# Altium PCB 分控板.PcbDoc
Units mil, origin at the board's own origin, x right, y up, seen from the top; angles counter-clockwise.
Board outline 3945.08 x 2845.03 mil, 2 copper layers (Top Layer, Bottom Layer); 89 components, 68 nets, 328 pads, 92 vias.
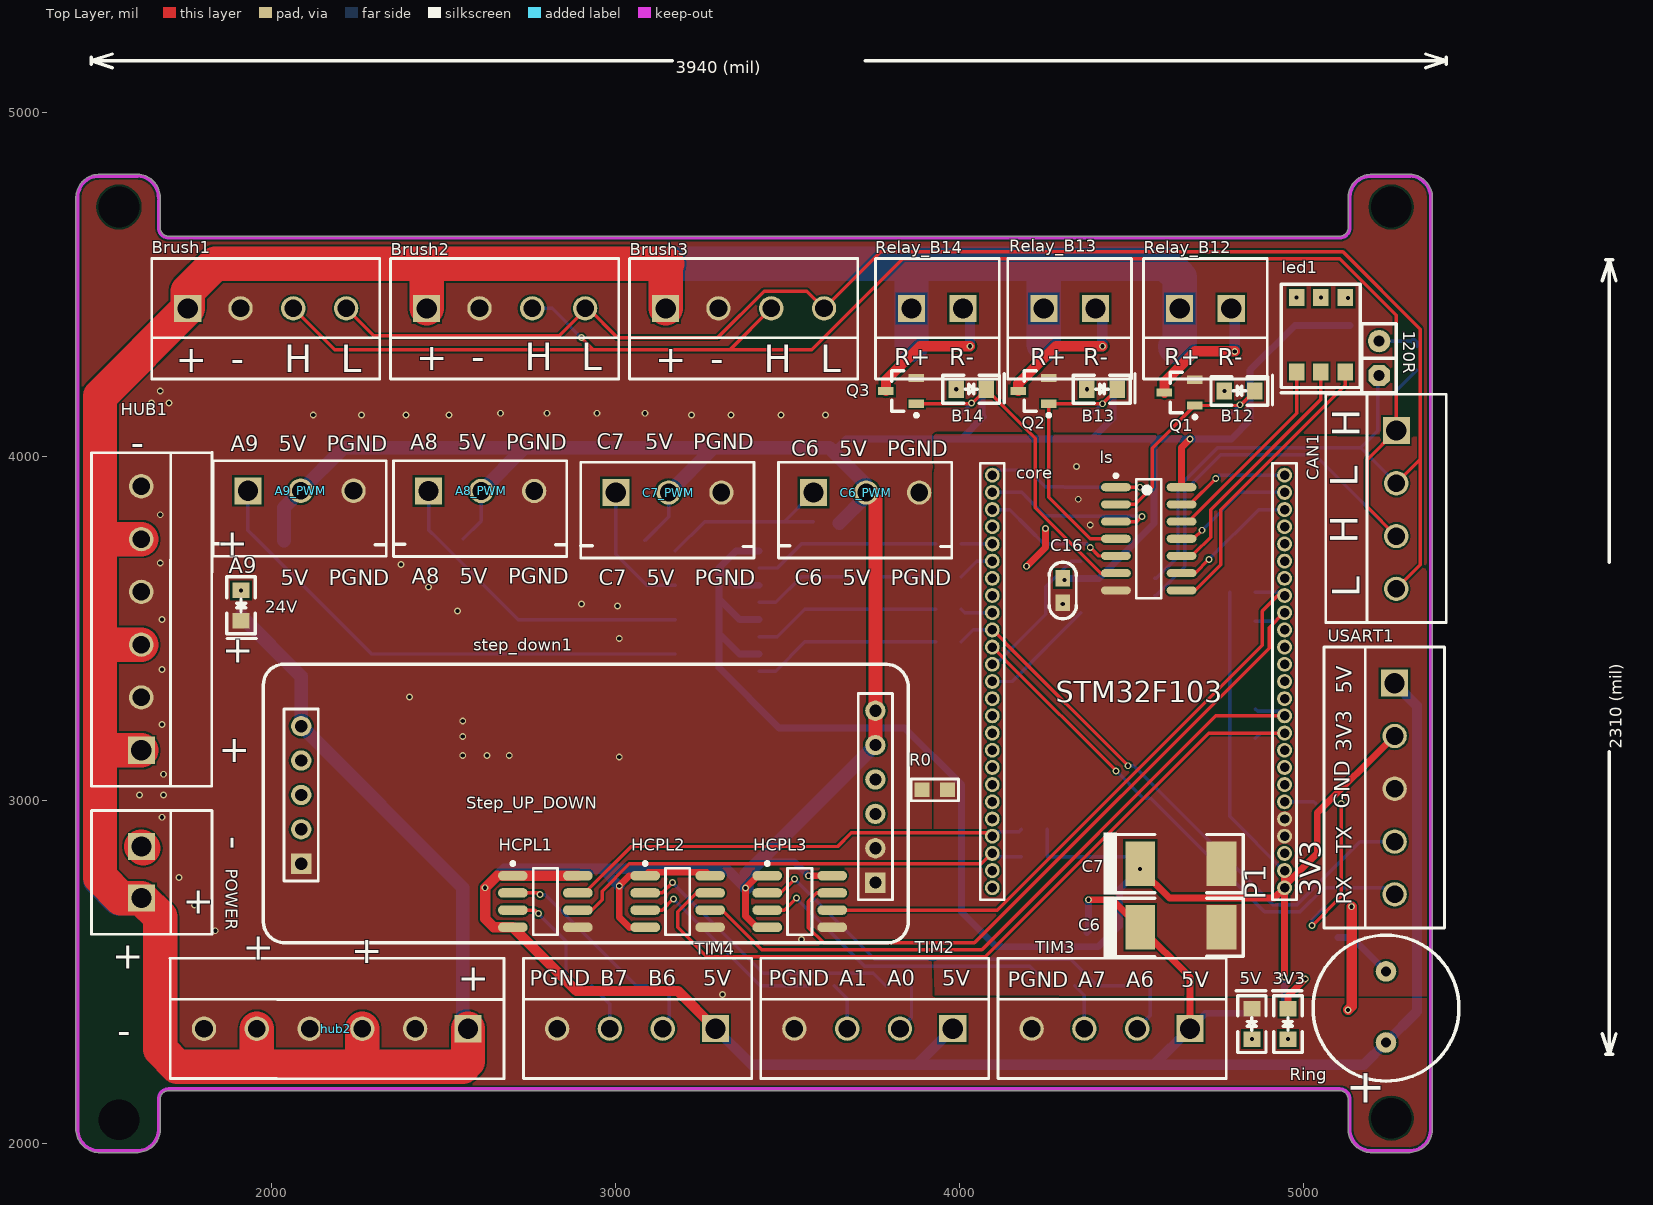
[diagram p0: Top Layer view]
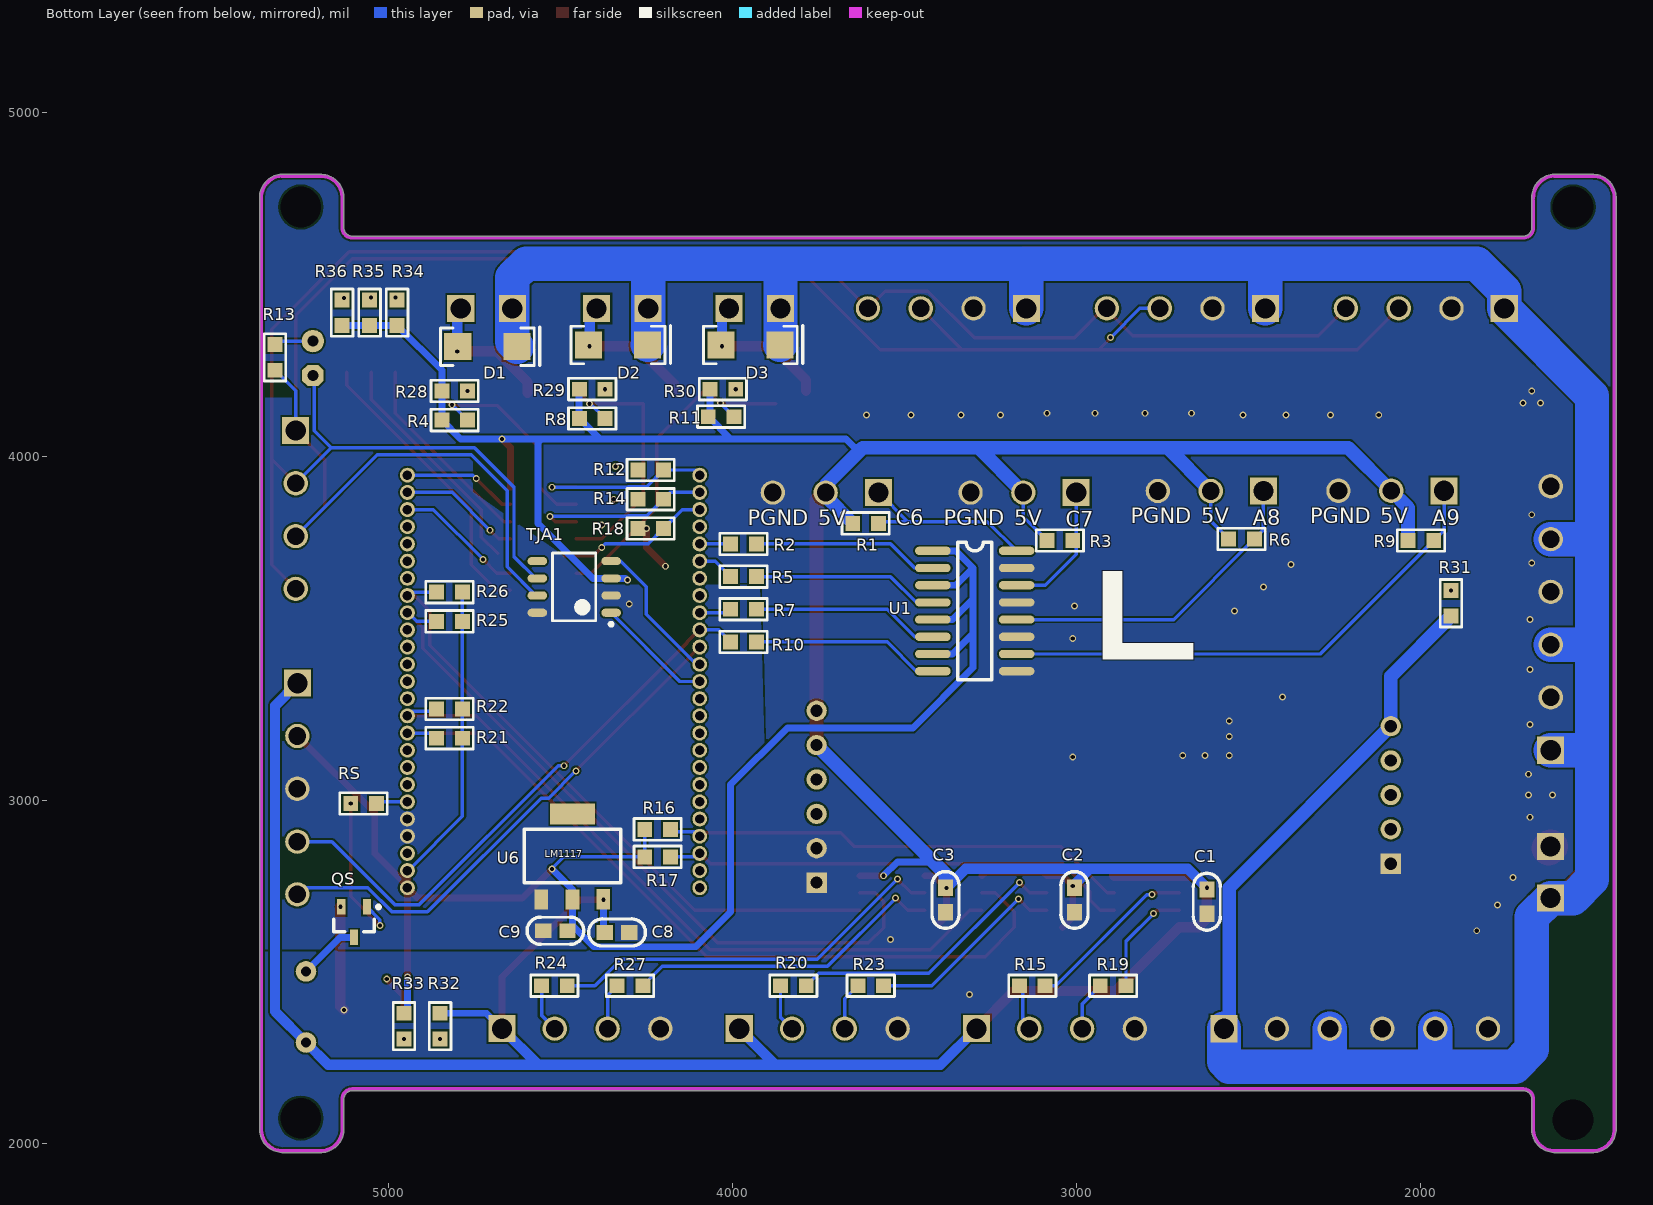
[diagram p1: Bottom Layer view, seen from below]

## Layer stack, top to bottom
Top Layer: signal copper 1.4
Dielectric: dielectric 12.6, FR-4, Dk 4.8
Bottom Layer: signal copper 1.4

## Board outline
1494.8,1974.99 ccw(c1495,1980) 1495,1974.98 1604.9,1974.98 ccw(c1607.5,2042.5) 1675.01,2039.8 ccw(c1670,2040) 1675.02,2040 1675.02,2130 cw(c1700,2130) 1700,2154.99 5105,2154.99 cw(c5105,2130) 5129.98,2130 5129.98,2045.1 ccw(c5197.5,2042.5) 5194.8,1974.99 ccw(c5195,1980) 5195,1974.98 5304.9,1974.98 ccw(c5307.5,2042.5) 5375.01,2039.8 ccw(c5370,2040) 5375.02,2040 5375.02,4749.9 ccw(c5307.5,4752.5) 5375.06,4752.5 ccw(c5307.5,4752.5) 5310.2,4820.01 ccw(c5310,4815) 5310,4820.02 5200.1,4820.02 ccw(c5197.5,4752.5) 5129.99,4755.2 ccw(c5135,4755) 5129.98,4755 5129.98,4665 cw(c5105,4665) 5105,4640.02 1700,4640.02 cw(c1700,4665) 1675.02,4665 1675.02,4745 ccw(c1670,4745) 1674.35,4747.5 ccw(c1670,4750) 1675.01,4749.8 ccw(c1607.5,4752.5) 1675.07,4752.5 ccw(c1607.5,4752.5) 1610.2,4820.01 ccw(c1610,4815) 1610,4820.02 1500.1,4820.02 ccw(c1497.5,4752.5) 1429.99,4755.2 ccw(c1435,4755) 1429.98,4755 1429.98,2045.1 ccw(c1497.5,2042.5)

## Design rules (kind name [scope] priority, off if disabled: settings)
Clearance [All] p1: gap=6
PolygonConnect [All] p1: connectstyle=Direct reliefconductorwidth=10 reliefentries=4 polygonreliefangle="90 Angle" airgapwidth=10
RoutingVias [All] p1: holewidth=28 width=50 viastyle="Through Hole" minholewidth=28 minwidth=50 maxholewidth=28 maxwidth=50
SolderMaskExpansion [All] p1: expansion=4
Width [All] p1: maxlimit=100 minlimit=10 preferedwidth=10 minimp=50.000000 maximp=50.000000 favimp=50.000000
28 further rules are at their usual default settings.

## Components (designator, comment, footprint, x,y, rotation, side; value= is the part's Value field where it differs from the comment)
3V3 "lED" 0805D 4955,2305 r90 top
5V "lED" 0805D 4850,2305 r90 top
24V "lED" 0805D 1910,3610 r270 top
120R "Header 2" SIP2 5220,4335 r270 top
A8_PWM "Header 3" "Green 3P" 2455.18,3899.53 r0 top
A9_PWM "Header 3" "Green 3P" 1930,3900 r0 top
B12 "lED" 0805D 4770,4190 r0 top
B13 "lED" 0805D 4370,4195 r0 top
B14 "lED" 0805D 3990,4195 r0 top
Brush1 "Header 4" Green_4P 1830,4525 r0 top
Brush2 "Header 4" Green_4P 2525,4525 r0 top
Brush3 "Header 4" Green_4P 3220,4525 r0 top
C1 "Cap" CAP-MLCC-0603 2620,2740 r90 bottom
C2 "Cap" CAP-MLCC-0603 3005,2745 r90 bottom
C3 "Cap" CAP-MLCC-0603 3380,2745 r90 bottom
C6 "Cap Pol1" 6032C 4525,2630 r180 top
C6_PWM "Header 3" "Green 3P" 3575,3895 r0 top
C7 "Cap Pol1" 6032C 4525,2815 r180 top
C7_PWM "Header 3" "Green 3P" 3000,3895 r0 top
C8 "Cap" CAP-MLCC-0603 4300,2615 r180 bottom
C9 "Cap" CAP-MLCC-0603 4550,2620 r0 bottom
C16 "Cap" CAP-MLCC-0603 4300,3645 r90 top
CAN1 "Header 4" Green_4P 5365,4000 r270 top
core "STM32F103 SMALL" STM32F103SMALL 4545,3330 r90 top
D1 "Diode" SS34 4715,4315 r0 bottom
D2 "Diode" SS34 4335,4320 r0 bottom
D3 "Diode" SS34 3950,4320 r0 bottom
HCPL1 "HCPL0630" SOIC8 2795,2705 r0 top
HCPL2 "HCPL0630" SOIC8 3180,2705 r0 top
HCPL3 "HCPL0630" SOIC8 3535,2705 r0 top
HUB1 "Header 6" Green_6P 1525,3220 r90 top (schematic designator hub1)
hub2 "Header 6" Green_6P 2495,2240 r180 top
led1 "5050 LED" 5050LED 4980,4245 r0 top
ls "74ls07_2" 74ls07 4550,3760 r0 top
POWER "Header 2" Green_2P 1525.37,2790 r90 top
Q1 "MOSFET N" NMOS_SOT23 4640,4185 r180 top
Q2 "MOSFET N" NMOS_SOT23 4215,4190 r180 top
Q3 "MOSFET N" NMOS_SOT23 3830,4190 r180 top
QS "8050" SOT-23B_N 5100,2645 r270 bottom
R0 "Res1" RES-0603 3965,3030 r0 top
R1 "RES" RES-0603 3575,3805 r180 bottom
R2 "RES" RES-0603 4005,3745 r0 bottom
R3 "RES" RES-0603 3010,3755 r180 bottom
R4 "RES" RES-0603 4845,4105 r0 bottom
R5 "RES" RES-0603 4005,3650 r0 bottom
R6 "RES" RES-0603 2481.84,3759.53 r180 bottom
R7 "RES" RES-0603 4005,3555 r0 bottom
R8 "RES" RES-0603 4445,4110 r0 bottom
R9 "RES" RES-0603 1960,3755 r180 bottom
R10 "RES" RES-0603 4005,3460 r0 bottom
R11 "RES" RES-0603 4070,4115 r0 bottom
R12 "Res1" RES-0603 4275,3960 r0 bottom
R13 "Res1" RES-0603 5330,4325 r90 bottom
R14 "Res1" RES-0603 4275,3875 r0 bottom
R15 "Res1" RES-0603 3165,2460 r0 bottom
R16 "Res1" RES-0603 4180,2915 r180 bottom
R17 "Res1" RES-0603 4180,2835 r180 bottom
R18 "Res1" RES-0603 4275,3790 r0 bottom
R19 "Res1" RES-0603 2930,2460 r0 bottom
R20 "Res1" RES-0603 3860,2460 r0 bottom
R21 "Res1" RES-0603 4860,3180 r0 bottom
R22 "Res1" RES-0603 4860,3265 r0 bottom
R23 "Res1" RES-0603 3635,2460 r0 bottom
R24 "Res1" RES-0603 4555,2460 r0 bottom
R25 "Res1" RES-0603 4860,3520 r0 bottom
R26 "Res1" RES-0603 4860,3605 r0 bottom
R27 "Res1" RES-0603 4335,2460 r0 bottom
R28 "RES" RES-0603 4845,4190 r0 bottom
R29 "RES" RES-0603 4445,4195 r0 bottom
R30 "RES" RES-0603 4065,4195 r0 bottom
R31 "RES" RES-0603 1910,3535 r270 bottom
R32 "RES" RES-0603 4850,2380 r90 bottom
R33 "RES" RES-0603 4955,2380 r90 bottom
R34 "RES" RES-0603 4975,4455 r90 bottom
R35 "RES" RES-0603 5055,4455 r90 bottom
R36 "RES" RES-0603 5135,4455 r90 bottom
Relay_B12 "Header 2" Green_2P 4715,4525 r0 top
Relay_B13 "Header 2" Green_2P 4320,4525 r0 top
Relay_B14 "Header 2" Green_2P 3935,4525 r0 top
Ring "Bell" RING 5240,2395 r90 top
RS "Res1" RES-0603 5110,2990 r0 bottom
step_down1 "Step_DOWN" Step_Up_Down 2890,3005 r0 top
TIM2 "Header 4" Green_4P 3905,2240.37 r180 top
TIM3 "Header 4" Green_4P 4595,2240.37 r180 top
TIM4 "Header 4" Green_4P 3215,2240.37 r180 top
TJA1 "TJA1050" TJA1050 4460,3620 r0 bottom
U1 "TLP281-4" SOP16 3405,3725 r180 bottom
U6 "tlv1117-3.3" LM1117 4475,2835 r180 bottom
USART1 "Header 5" Green_5P 5360,3265 r270 top

## Footprints (in the part's own frame and the unit in brackets; to place one, negate y for a bottom-side part, rotate by r counter-clockwise, add the part's x,y. Pads: shape width x height; smd on the part's side, far side on the other; paste and mask are expansions set on the pad)
74ls07 [mm]
  oval 2.2x0.6 smd: 1(-2.425,3.81) 2(-2.425,2.54) 3(-2.425,1.27) 4(-2.425,0) 5(-2.425,-1.27) 6(-2.425,-2.54) 7(-2.425,-3.81) 8(2.425,-3.81) 9(2.425,-2.54) 10(2.425,-1.27) 11(2.425,0) 12(2.425,1.27) 13(2.425,2.54) 14(2.425,3.81)
  silkscreen extent -2.55,-4.4 0.93,4.78, body extent -2,-4.4 2,4.4, height 1.7
0805D [mil]
  rect 45x50 smd: A(0,0) K(88,0)
  silkscreen extent -39,-41 140,45
5050LED [mm]
  rect 1.143x1.27 smd: A1(0,5.5) A2(1.8,5.5) A3(3.6,5.5) K1(0,0) K2(1.8,0) K3(3.6,0)
  silkscreen extent -1.14,-1.52 4.7,6.48
6032C [mm]
  rect 2.2x3.3 smd: 1(0,0) 2(-6,0)
  silkscreen extent -7.6,-2.29 2.72,2.28
CAP-MLCC-0603 [mm]
  rect 1.2x1.1 smd: 1(0,0) 2(-1.8,0)
  silkscreen extent -3,-1 1.2,1, body extent -1.77,-0.47 -0.02,0.48, height 0.85
"Green 3P" [mm]
  rect 2x2 hole 1.5: 1(0.004,-0.012)
  round 1.8 hole 1.3: 2(3.904,-0.012) 3(7.804,-0.012)
  silkscreen extent -2.58,-4.85 10.22,2.22
Green_2P [mm]
  rect 2x2 hole 1.5: 1(-1.905,-2.413) 2(1.905,-2.413)
  silkscreen extent -4.57,-7.62 4.57,1.27
Green_4P [mm]
  rect 2x2 hole 1.5: 1(-1.905,-2.413)
  round 1.8 hole 1.3: 2(1.995,-2.413) 3(5.895,-2.413) 4(9.795,-2.413)
  silkscreen extent -4.57,-7.62 12.28,1.27
Green_5P [mm]
  rect 2x2 hole 1.5: 1(-1.905,-2.413)
  round 1.8 hole 1.3: 2(1.995,-2.413) 3(5.895,-2.413) 4(9.795,-2.413) 5(13.695,-2.413)
  silkscreen extent -4.57,-7.62 16.18,1.27
Green_6P [mm]
  rect 2x2 hole 1.5: 1(-1.905,-2.413)
  round 1.8 hole 1.3: 2(1.995,-2.413) 3(5.895,-2.413) 4(9.795,-2.413) 5(13.695,-2.413) 6(17.595,-2.413)
  silkscreen extent -4.57,-7.63 20.12,1.27
LM1117 [mm]
  rect 1x1.5 smd: 1(-2.043,-3.148) 2(0.256,-3.148) 3(2.53,-3.123)
  rect 3.3x1.549 smd: 4(0.254,3.175)
  silkscreen extent -3.3,-1.91 3.81,2.03
NMOS_SOT23 [mm]
  rect 1.15x0.6 smd: D(1.125,0) G(-1.125,0.95) S(-1.125,-0.95)
  silkscreen extent -1.25,-1.5 0.7,1.92, body extent -0.7,-1.5 0.7,1.5, height 1.14
RES-0603 [mm]
  rect 1.1x1.1 smd: 1(0,0) 2(-1.9,0)
  silkscreen extent -2.7,-0.8 0.8,0.8, body extent -1.8,-0.47 -0.1,0.48, height 0.6
RING [mil]
  round 60 hole 30: 1(-100,0) 2(106.69,0)
  silkscreen extent -212,-212 212,212
SIP2 [mil]
  round 65 hole 32: 1(0,0)
  oct 62x62 hole 32: 2(100,0)
  silkscreen extent -50,-50 150,50
SOIC8 [mm]
  oval 2.2x0.7 smd: 1(-2.4,1.905) 2(-2.4,0.635) 3(-2.4,-0.635) 4(-2.4,-1.905) 5(2.4,-1.905) 6(2.4,-0.635) 7(2.4,0.635) 8(2.4,1.905)
  silkscreen extent -2.52,-2.45 0.9,2.93
SOP16 [mil]
  oval 103.62x24 smd: 1(-11.81,0) 2(-11.81,-50) 3(-11.81,-100) 4(-11.81,-150) 5(-11.81,-200) 6(-11.81,-250) 7(-11.81,-300) 8(-11.81,-350) 9(231.81,-350) 10(231.81,-300) 11(231.81,-250) 12(231.81,-200) 13(231.81,-150) 14(231.81,-100) 15(231.81,-50) 16(231.81,0)
  silkscreen extent 60,-375 160,25
SOT-23B_N [mm] "SOT23, 3-Leads, Body 2.9x1.3mm, Pitch 0.95mm, Lead Span 2.4mm, IPC Medium Density"
  rect 1.15x0.6 smd: 1(-1.125,0.95) 2(-1.125,-0.95) 3(1.125,0)
  silkscreen extent -1.25,-1.5 0.7,1.92, body extent -0.7,-1.5 0.7,1.5, height 1.14
SS34 [mm]
  rect 2x2 smd: A(2.125,-0.102) K(-2.25,-0.102)
  silkscreen extent -3.94,-1.52 3.4,1.3, body extent -2.48,-1.48 2.37,1.3, height 1.4
Step_Up_Down [mm]
  rect 1.5x1.5 hole 0.9: 1(-20.447,-4.826) 6(21.971,-6.223)
  round 1.5 hole 0.9: 2(-20.447,-2.286) 3(-20.447,0.254) 4(-20.447,2.794) 5(-20.447,5.334) 7(21.971,-3.683) 8(21.971,-1.143) 9(21.971,1.397) 10(21.971,3.937) 11(21.971,6.477)
  silkscreen extent -23.24,-10.67 24.38,9.91
STM32F103SMALL [mm]
  round 1.1 hole 0.7: 1(-14.859,-10.16) 2(-13.589,-10.16) 3(-12.319,-10.16) 4(-11.049,-10.16) 5(-9.779,-10.16) 6(-8.509,-10.16) 7(-7.239,-10.16) 8(-5.969,-10.16) 9(-4.699,-10.16) 10(-3.429,-10.16) 11(-2.159,-10.16) 12(-0.889,-10.16) 13(0.381,-10.16) 14(1.651,-10.16) 15(2.921,-10.16) 16(4.191,-10.16) 17(5.461,-10.16) 18(6.731,-10.16) 19(8.001,-10.16) 20(9.271,-10.16) 21(10.541,-10.16) 22(11.811,-10.16) 23(13.081,-10.16) 24(14.351,-10.16) 25(15.621,-10.16) 26(-14.859,11.43) 27(-13.589,11.43) 28(-12.319,11.43) 29(-11.049,11.43) 30(-9.779,11.43) 31(-8.509,11.43) 32(-7.239,11.43) 33(-5.969,11.43) 34(-4.699,11.43) 35(-3.429,11.43) 36(-2.159,11.43) 37(-0.889,11.43) 38(0.381,11.43) 39(1.651,11.43) 40(2.921,11.43) 41(4.191,11.43) 42(5.461,11.43) 43(6.731,11.43) 44(8.001,11.43) 45(9.271,11.43) 46(10.541,11.43) 47(11.811,11.43) 48(13.081,11.43) 49(14.351,11.43) 50(15.621,11.43)
  silkscreen extent -15.75,-11.05 16.51,12.32
TJA1050 [mm] "SOIC, 8-Leads, Body 4.90x3.90mm, Pitch 1.27mm, IPC Medium Density"
  oval 1.45x0.6 smd: 1(-2.725,1.905) 2(-2.725,0.635) 3(-2.725,-0.635) 4(-2.725,-1.905) 5(2.725,-1.905) 6(2.725,-0.635) 7(2.725,0.635) 8(2.725,1.905)
  silkscreen extent -2.85,-2.5 1.6,2.88, body extent -2,-2.5 2,2.5, height 1.75

## Part data
3V3 5V 24V B12 B13 B14: library part 00-D-LED, "LED"
120R POWER Relay_B12 Relay_B13 Relay_B14: "Header, 2-Pin"
A8_PWM A9_PWM C6_PWM C7_PWM: "Header, 3-Pin"
Brush1 Brush2 Brush3 CAN1 TIM2 TIM3 TIM4: "Header, 4-Pin"
C1 C2 C3 C8 C9 C16: "Capacitor"
C6 C7: "Polarized Capacitor (Radial)"
HUB1 hub2: "Header, 6-Pin"
QS: library part QNPN, "NPN Bipolar Transistor"
R0 R12 R13 R14 R15 R16 R17 R18 R19 R20 R21 R22 R23 R24 R25 R26 R27 RS: "Resistor"
R1 R2 R3 R4 R5 R6 R7 R8 R9 R10 R11 R28 R29 R30 R31 R32 R33 R34 R35 R36: "电阻"
Ring: "Electrical Bell"
TJA1: "CAN总线收发器"
U1: library part IC-TLP521-4, "TLP521-4,TLP281-4"
U6: library part LM1117IMP-5.0, "800mA Low-Dropout Linear Regulator"
USART1: "Header, 5-Pin"

## Free pads (board coordinates)
  round 30 hole 118.11: 3(1555,2070) 3(1555,4725) 3(5255,2075) 3(5255,4725)

## Via types
v1: diameter 20, hole 12, Top Layer to Bottom Layer, 92 vias

## Nets (pads, with @x,y where several pads share a name; then routed paths per layer and width w, separated by ;. In a path a pad name is that pad's centre, name@x,y a point inside that pad or via, vN(x,y) a via of type N, cw(c..) or ccw(c..) an arc to the next point about the centre after c; other vN are vias at no path point)
3V3: C7.1 C9.2 core.1 core.2 R16.2 R17.2 R21.2 R22.2 R25.2 R26.2 R33.1 U1.1 U1.3 U1.5 U1.7 U6.2 USART1.2 | length 5480.4
  Top Layer w20: v1(4525,2800) 4610,2715 4915,2715 core.1 ; v1(4945,2485) core.1 ; core.2 core.1@4945,2750 ; USART1.2 5264.03,3186.46 5040,2962.43 5040,2845 core.1@4945,2750 ; core.1 core.1@4945,2750
  Bottom Layer w10: R16.2 R17.2 4490,2835 v1(4525,2800) ; R26.2 R25.2 R22.2 R21.2 4785.2,2952.97 4943.16,2795 core.2
  Bottom Layer w20: U1.7 3360,3425 3300,3485 ; U1.5 3360,3525 3300,3585 ; U1.3 3350,3625 3300,3675 ; U1.1 3350,3725 3300,3675 ; v1(4525,2800) 4464.92,2739.92 U6.2 4464.92,2634.21 4463.64,2634.21 4402.77,2573.35 4106.65,2573.35 4005,2675 4005,3045 3840,3210 3475,3210 3300,3385 3300,3485 ; v1(4945,2485) 4945,2390 R33.1 ; 3300,3485 3300,3585 ; 3300,3585 3300,3675
5V: A8_PWM.2 A9_PWM.2 C1.1 C2.1 C3.1 C6.1 C6_PWM.2 C7_PWM.2 C8.2 C16.1 HCPL1.1 HCPL1.4 HCPL1.8 HCPL2.1 HCPL2.4 HCPL2.8 HCPL3.1 HCPL3.4 HCPL3.8 ls.14 R1.2 R3.2 R4.1 R6.2 R8.1 R9.2 R11.1 R28.1 R29.1 R30.1 R32.1 R34.2 R35.2 R36.2 Ring.1 step_down1.10 step_down1.11 TIM2.1 TIM3.1 TIM4.1 TJA1.3 U6.3 USART1.1 | length 14036.5
  Top Layer w20: 2655,2780 HCPL1.1@2670,2780 ; 3040,2630 3010,2660 v1(3010,2750) 3040,2780 HCPL2.1 3095.51,2790 3264.49,2790 HCPL2.8 ; 3400,2640 3377.2,2662.8 v1(3377.2,2743.99) 3413.21,2780 HCPL3.1 ; v1(3560,2780) HCPL3.8 ; v1(4375,2710) 4445,2710 C6.1 4670,2485 TIM3.1 ; ls.14 4645.47,4025.47 v1(4670,4050)
  Top Layer w30: 2655,2780 v1(2620,2745) 2620,2655 2645,2630 HCPL1.4 2885.51,2445 3180.37,2445 TIM4.1 ; HCPL1.1@2670,2780 HCPL1.1 HCPL1.8
  Top Layer w40: C6_PWM.2 3755,3868.24 ; step_down1.10 step_down1.11 3755,3868.24 ; C6_PWM.2@3755,3875 3755,3868.24
  Bottom Layer w10: R6.2 2608.89,3811.77 A8_PWM.2 ; R3.2 3153.72,3823.92 C7_PWM.2
  Bottom Layer w20: 3415,2820 3520,2820 v1(3560,2780) ; 3620,4025 3645,4025 3670,4050 4005,4050 ; R30.1 4065,4120 R11.1 4005,4050 ; v1(4305.18,3639.82) 4310.36,3645 TJA1.3 4405,3645 4565,3805 4565,4040 4555,4050 ; C8.2 4375,2619.13 v1(4375,2710) ; R29.1 4445.6,4194.4 4445.6,4110.6 R8.1 4385,4050 ; TIM3.1 4714.63,2380 R32.1 ; R36.2 R35.2 R34.2 4845,4250.2 R28.1 R4.1 4790,4050 v1(4670,4050) 4555,4050 ; 4005,4050 4385,4050 ; 4385,4050 4555,4050
  Bottom Layer w30: v1(2620,2745) 2675,2800 2960,2800 ; v1(3010,2750) 2960,2800 ; TIM4.1 3395.37,2230 3874.63,2230 ; v1(3377.2,2743.99) 3321.2,2800 2960,2800 ; TIM2.1 3874.63,2230 ; TIM3.1 4564.63,2230 ; USART1.1 5330,3275 5330,2385 Ring.1 5175,2230 4564.63,2230 ; 3874.63,2230 4564.63,2230
  Bottom Layer w40: R9.2 2034.8,3850.61 A9_PWM.2 2209.19,4025 2734.84,4025 ; A8_PWM.2 2734.84,4025 ; C7_PWM.2 3154.53,3894.53 3285,4025 ; C3.1 3380,2785 3415,2820 step_down1.10 ; R1.2 3728.72,3883.92 C6_PWM.2 3728.72,3916.28 3620,4025 3285,4025 ; 2734.84,4025 3285,4025
24V: Brush1.1 Brush2.1 Brush3.1 D1.K D2.K D3.K HUB1.1 HUB1.3 HUB1.5 hub2.1 hub2.3 hub2.5 POWER.1 R31.1 Relay_B12.1 Relay_B13.1 Relay_B14.1 step_down1.5 | length 15105
  Top Layer w100: HUB1.1 1505,3145 1500,3150 ; HUB1.3 1502.09,3452.09 1500,3450 ; HUB1.5 1504.17,3759.17 1500,3755 ; hub2.5 1955.83,2230.83 1950,2225 ; hub2.3 2262.91,2232.91 2255,2225 ; Brush2.1 2450,4550 2460,4560 ; hub2.1 2570,2240 2555,2225 2255,2225 ; Brush3.1 3145,4555 3150,4560 2460,4560 ; 1500,3150 1500,3450 ; 1500,3150 1500,2775 1560,2715 POWER.1 1675,2660.37 1675,2275 1725,2225 1950,2225 ; 1500,3450 1500,3755 ; 1500,3755 1500,4175 Brush1.1 1755,4480 1835,4560 2460,4560 ; 1950,2225 2255,2225
  Bottom Layer w40: R31.1 2085,3360 step_down1.5 2555,2745 2555,2350 hub2.1
  Bottom Layer w100: HUB1.1 1500,3145 ; HUB1.3 1512.09,3452.09 1500,3440 ; HUB1.5 1509.17,3759.17 1500,3750 ; hub2.5 1955.83,2225.83 1955,2225 ; hub2.3 2262.91,2227.91 2260,2225 ; Brush2.1 2450,4560 ; hub2.1 2570,2240 2555,2225 2260,2225 ; Brush3.1 3145,4555 3140,4560 ; D3.K 3860,4325.4 Relay_B14.1 3860,4555 3855,4560 ; D2.K 4245,4325.4 Relay_B13.1 4245,4550 4235,4560 ; D1.K 4640,4332.6 Relay_B12.1 4640,4520 4600,4560 4235,4560 ; 1500,3145 1500,3440 ; 1500,3145 1500,2770 1555,2715 POWER.1 1675,2660.37 1675,2275 1725,2225 1955,2225 ; 1500,3440 1500,3750 ; 1500,3750 1500,4175 Brush1.1 1755,4480 1835,4560 2450,4560 ; 1955,2225 2260,2225 ; 2450,4560 3140,4560 ; 3140,4560 3855,4560 ; 3855,4560 4235,4560
A0: R20.1 TIM2.2 | length 138.5
  Bottom Layer w10: TIM2.2 3860,2368.91 R20.1
A1: R23.1 TIM2.3 | length 140.3
  Bottom Layer w10: R23.1 3672.91,2422.09 TIM2.3
A6: R24.1 TIM3.2 | length 140.6
  Bottom Layer w10: TIM3.2 4555,2373.91 R24.1
A7: R27.1 TIM3.3 | length 136.2
  Bottom Layer w10: R27.1 4362.91,2432.09 TIM3.3
A8: A8_PWM.1 R6.1 U1.12 | length 939
  Bottom Layer w10: A8_PWM.1 2455.35,3786.02 R6.1 2716.37,3525 U1.12
A9: A9_PWM.1 R9.1 U1.10 | length 1506.8
  Bottom Layer w10: A9_PWM.1 1930.18,3784.82 R9.1 2290,3425 U1.10
B6: R15.1 TIM4.2 | length 136.5
  Bottom Layer w10: TIM4.2 3155,2353.91 3155,2450 R15.1
B7: R19.1 TIM4.3 | length 146.5
  Bottom Layer w10: R19.1 2982.91,2407.09 TIM4.3
B12: B12.K ls.2 Q1.G R4.2 | length 670.3
  Top Layer w10: ls.2 4510.36,3860 4560,3909.64 4560,4023.31 Q1.G 4815.6,4147.6 B12.K
  Bottom Layer w10: R4.2 4815,4149.8 v1(4815,4150)
B13: B13.K ls.4 Q2.G R8.2 | length 796.4
  Top Layer w10: ls.4 4380,3760 4259.29,3880.71 Q2.G v1(4415.6,4152.6) B13.K
  Bottom Layer w10: R8.2 4412.79,4152.6 v1(4415.6,4152.6)
B14: B14.K ls.6 Q3.G R11.2 | length 994.8
  Top Layer w10: Q3.G 4035.6,4152.6 B14.K 4220,4053 4220,3850 4410,3660 ls.6
  Bottom Layer w10: R11.2 4035,4154.8 v1(4035,4155)
C6: C6_PWM.1 R1.1 U1.16 | length 557
  Bottom Layer w10: U1.16 3258.19,3810 R1.1@3575,3810 ; 3490,3810 C6_PWM.1@3574.85,3894.85
C7: C7_PWM.1 R3.1 U1.14 | length 389.9
  Bottom Layer w10: C7_PWM.1 3000.18,3714.82 3090,3625 U1.14
CAN_H: Brush1.3 Brush2.3 Brush3.3 CAN1.1 CAN1.3 R13.2 TJA1.7 | length 5846.4
  Top Layer w10: Brush1.3 2182.09,4310 2935,4310 ; v1(2900,4345) 2935,4310 ; Brush3.3 3332.09,4310 ; CAN1.3 5185,3852.91 5185,3990 CAN1.1 5270,4410 5105,4575 3835,4575 3570,4310 3332.09,4310 ; 2935,4310 3332.09,4310
  Bottom Layer w10: Brush2.3 2815,4430 v1(2900,4345) ; TJA1.7 4571.93,3595 4655,3678.07 4655,3900 4760,4005 5032.91,4005 CAN1.3 ; CAN1.1 5270,4190.2 R13.2
CAN_L: 120R.2 Brush1.4 Brush2.4 Brush3.4 CAN1.2 CAN1.4 TJA1.6 | length 5604
  Top Layer w10: Brush1.4 2295.63,4350 2835,4350 2910.63,4425.63 Brush2.4 2920,4430 3005,4345 3295.76,4345 3431.2,4480.43 3555.2,4480.43 Brush3.4 3770.63,4595 5115,4595 5340,4370 5340,3991.46 ; CAN1.4 5340,3684.37 5340,3991.46 ; CAN1.2 5340,3991.46
  Bottom Layer w10: TJA1.6 4571.93,3645 4635,3708.07 4635,3910 4750,4025 5166.46,4025 ; 120R.2 5215.63,4230.63 5215.63,4074.17 5166.46,4025 ; CAN1.2 5166.46,4025
CAN_RX: core.39 TJA1.4 | length 447.7
  Bottom Layer w10: core.39@4108.35,3408.35 core.39 4105,3395 4250,3540 4250,3620 4325,3695 TJA1.4
CAN_TX: core.38 TJA1.1 | length 340.6
  Bottom Layer w10: core.38 4152.72,3345 TJA1.1
GND: 3V3.K C6.2 C7.2 C8.1 C9.1 C16.2 core.4 core.5 ls.7 R0.1 R12.1 R14.1 R18.1 TJA1.2 TJA1.8 U6.1 USART1.3 | length 240.5
  Top Layer w20: v1(4195,3680) 4250,3735 v1(4250,3790) ; 3V3.K 4955,2430 v1(5005,2480)
  other v1: 4300,3570 4380,3800 4345,3875 4340,3970
LED1: core.23 ls.9 | length 376.2
  Top Layer w10: ls.9 4685,3660 v1(4725,3700)
  Bottom Layer w10: v1(4725,3700) 4870,3845 core.23
LED2: core.24 ls.11 | length 355.4
  Top Layer w10: ls.11 4680,3760 v1(4705,3785)
  Bottom Layer w10: v1(4705,3785) 4815,3895 core.24
LED3: core.25 ls.13 | length 334.7
  Top Layer w10: ls.13 4670,3860 v1(4745,3935)
  Bottom Layer w10: v1(4745,3935) 4755,3945 core.25
Net3V3_A: 3V3.A R33.2
  other v1: 4955,2305
Net5V_A: 5V.A R32.2
  other v1: 4850,2305
Net24V_A: 24V.A R31.2
  other v1: 1910,3609.8
Net120R_1: 120R.1 R13.1 | length 114.1
  Bottom Layer w10: 120R.1 R13.1@5320,4335
  Bottom Layer w20: R13.1@5320,4335 R13.1
NetB12_A: B12.A R28.2
  other v1: 4770,4190
NetB13_A: B13.A R29.2
  other v1: 4370,4195
NetB14_A: B14.A R30.2
  other v1: 3990,4195
NetD1_A: D1.A Q1.D Relay_B12.2 | length 401.1
  Top Layer w30: Q1.D 4595.71,4215.71 4685,4305 v1(4800,4305)
  Bottom Layer w30: Relay_B12.2 4800,4420 v1(4800,4305)
NetD2_A: D2.A Q2.D Relay_B13.2 | length 428.6
  Top Layer w30: Q2.D 4170.71,4210.71 4280,4320 v1(4415,4320)
  Bottom Layer w30: Relay_B13.2 4415,4410 v1(4415,4320)
NetD3_A: D3.A Q3.D Relay_B14.2 | length 434.4
  Top Layer w30: Q3.D 3785.71,4220.71 3885,4320 v1(4030,4320)
  Bottom Layer w30: Relay_B14.2 4030,4410 v1(4030,4320)
NetHCPL1_2: HCPL1.2 R15.2 | length 501.5
  Top Layer w10: HCPL1.2 2775,2730 v1(2780,2725)
  Bottom Layer w10: v1(2780,2725) 2795,2725 3060,2460 R15.2
NetHCPL1_3: HCPL1.3 R19.2 | length 321.8
  Top Layer w10: HCPL1.3 2765,2680 v1(2775,2670)
  Bottom Layer w10: v1(2775,2670) 2855.2,2589.8 R19.2
NetHCPL2_2: HCPL2.2 R20.2 | length 836.4
  Top Layer w10: HCPL2.2 3135,2730 v1(3165,2760)
  Bottom Layer w10: v1(3165,2760) 3428.35,2496.65 3748.54,2496.65 R20.2
NetHCPL2_3: HCPL2.3 R23.2 | length 592.7
  Top Layer w10: HCPL2.3 3135,2680 v1(3167.5,2712.5)
  Bottom Layer w10: v1(3167.5,2712.5) 3420,2460 R23.2
NetHCPL3_2: HCPL3.2 R24.2 | length 1184.7
  Top Layer w10: HCPL3.2 3480,2730 v1(3520,2770)
  Bottom Layer w10: v1(3520,2770) 3753.35,2536.65 4322.87,2536.65 4399.52,2460 R24.2
NetHCPL3_3: HCPL3.3 R27.2 | length 939.8
  Top Layer w10: HCPL3.3 3490,2680 v1(3525,2715)
  Bottom Layer w10: v1(3525,2715) 3723.35,2516.65 4203.54,2516.65 R27.2
Netled1_A1: led1.A1 R34.1
  other v1: 4980,4461.54
Netled1_A2: led1.A2 R35.1
  other v1: 5050.87,4461.54
Netled1_A3: led1.A3 R36.1
  other v1: 5130,4460
Netled1_K1: led1.K1 ls.12 | length 584.9
  Top Layer w10: ls.12 4664.89,3810 4980,4125.11 led1.K1
Netled1_K2: led1.K2 ls.10 | length 680.1
  Top Layer w10: ls.10@4682.5,3717.5 4730,3765 4730,3845 5050.87,4165.87 led1.K2
Netled1_K3: led1.K3 ls.8 | length 855.4
  Top Layer w10: ls.8 4685,3610 4760,3685 4760,3845 5121.73,4206.73 led1.K3
NetQS_1: QS.1 RS.1 | length 460.1
  Top Layer w10: v1(5025,2635) 5110,2720 v1(5110,2990)
  Bottom Layer w10: v1(5025,2635) 5025,2651.69 QS.1
NetQS_3: QS.3 Ring.2 | length 181
  Bottom Layer w20: QS.3 5140.98,2600.71 Ring.2
NetR2_2: R2.2 U1.2 | length 542.4
  Bottom Layer w10: U1.2 3470,3675 3540,3745 R2.2
NetR5_2: R5.2 U1.4 | length 544.5
  Bottom Layer w10: U1.4 3465,3575 3540,3650 R5.2
NetR7_2: R7.2 U1.6 | length 546.5
  Bottom Layer w10: U1.6 3470,3475 3550,3555 R7.2
NetR10_2: R10.2 U1.8 | length 548.6
  Bottom Layer w10: U1.8 3465,3375 3550,3460 R10.2
PA0: core.10 HCPL2.7 R21.1 | length 2322.9
  Top Layer w10: HCPL2.7 3235,2730 3180,2675 3180,2630 3265,2545 4075,2545 4725,3195 core.10
  Bottom Layer w10: R21.1 4875,3195 core.10
PA1: core.11 HCPL2.6 R22.1 | length 2093.1
  Top Layer w10: HCPL2.6 3310,2680 3425,2565 4065,2565 4745,3245 core.11
  Bottom Layer w10: R22.1 4866.65,3258.35 4931.65,3258.35 core.11
PA6: core.17 HCPL3.7 R25.1 | length 2087.1
  Top Layer w10: HCPL3.7 3585,2730 3560,2705 3560,2629.26 3604.26,2585 4043.28,2585 4900,3441.72 4900,3501.84 4943.16,3545 core.17
  Bottom Layer w10: R25.1 4918.16,3520 4943.16,3545 core.17
PA7: core.18 HCPL3.6 R26.1 | length 1842.2
  Top Layer w10: HCPL3.6 4110,2680 4880,3450 4880,3550 4925,3595 core.18
  Bottom Layer w10: R26.1 4935,3605 core.18
PA8: core.42 R7.1 | length 94.1
  Bottom Layer w10: R7.1 4015,3545 core.42
PA9: core.41 R10.1 USART1.4 | length 1683.3
  Top Layer w10: core.41 4096.84,3495 4131.65,3460.18 4131.65,3458.35 v1(4490,3100)
  Bottom Layer w10: R10.1 4040,3495 core.41 ; v1(4490,3100) 4506.67,3100 4911.67,2695 4980,2695 5164.37,2879.37 USART1.4
PB6: core.29 HCPL1.7 R16.1 | length 1375.4
  Top Layer w10: HCPL1.7 2910,2730 3045,2865 3645,2865 3685,2905 4085,2905 core.29
  Bottom Layer w10: core.29 4108.35,2908.35 4173.35,2908.35 R16.1
PB7: core.28 HCPL1.6 R17.1 | length 1377.9
  Top Layer w10: HCPL1.6 2930,2680 2960,2710 2960,2735.36 3039.64,2815 4063.16,2815 4093.16,2845 core.28
  Bottom Layer w10: core.28 4105,2835 R17.1
PB12: core.50 ls.1 R12.2 | length 527.4
  Top Layer w10: ls.1 v1(4525,3910)
  Bottom Layer w10: core.50 4110,3960 R12.2 4248.54,3911.65 4302.87,3911.65 4304.52,3910 v1(4525,3910)
PB13: core.49 ls.3 R14.2 | length 545.7
  Top Layer w10: ls.3 4515,3810 v1(4530,3825)
  Bottom Layer w10: core.49 4180.2,3895 R14.2 4248.54,3826.65 4302.87,3826.65 4304.52,3825 v1(4530,3825)
PB14: core.48 ls.5 R18.2 | length 450.9
  Top Layer w10: v1(4380,3735) 4405,3710 ls.5 ls.5@4490,3710
  Bottom Layer w10: core.48 4145.2,3845 R18.2 4245.2,3745 4370,3745 v1(4380,3735)
PC6: core.46 R2.1 | length 90
  Bottom Layer w10: R2.1 core.46
PC7: core.45 R5.1 | length 108.6
  Bottom Layer w10: R5.1 4050,3695 core.45
PGND: 5V.K 24V.K A8_PWM.3 A9_PWM.3 Brush1.2 Brush2.2 Brush3.2 C1.2 C2.2 C3.2 C6_PWM.3 C7_PWM.3 HCPL1.5 HCPL2.5 HCPL3.5 HUB1.2 HUB1.4 HUB1.6 hub2.2 hub2.4 hub2.6 POWER.2 Q1.S Q2.S Q3.S QS.2 R0.2 step_down1.1 step_down1.6 step_down1.7 TIM2.4 TIM3.4 TIM4.4 U1.9 U1.11 U1.13 U1.15 | length 311.2
  Top Layer w30: v1(5130,2390) 5140,2400 v1(5140,2690)
  Top Layer w100: POWER.2 POWER.2@1625.37,2860
  other v1: 3310,2435 3540,2595 1835,2620 1775,2695 1730,2775 1680,2950 1615,3015 1685,3015 1685,3075 3010,3125 2555,3130 2625,3130 2690,3130 2555,3185 1680,3220 2555,3230 2400,3300 1680,3380 3010,3470 1680,3525 2540,3550 3005,3565 2900,3570 2455,3620 2375,3685 1675,3690 1675,3830 2120,4120 2260,4120 2390,4120 2515,4120 3220,4120 3335,4120 3480,4120 3610,4120 2665,4125 2800,4125 2945,4125 3085,4125 1650,4155 1700,4155 1675,4190
RING: core.6 RS.2 | length 92.3
  Bottom Layer w10: core.6 5030.2,2995 RS.2
RXD: core.40 USART1.5 | length 1527
  Top Layer w10: core.40 4096.84,3445 4131.65,3410.18 4131.65,3408.35 v1(4455,3085)
  Bottom Layer w10: v1(4455,3085) 4534.5,3005.5 4556.17,3005.5 4886.67,2675 4990,2675 5060,2745 5245.83,2745 USART1.5
pads on no net: core.3 core.7 core.8 core.9 core.12 core.13 core.14 core.15 core.16 core.19 core.20 core.21 core.22 core.26 core.27 core.30 core.31 core.32 core.33 core.34 core.35 core.36 core.37 core.43 core.44 core.47 step_down1.2 step_down1.3 step_down1.4 step_down1.8 step_down1.9 TJA1.5 U6.4

## Polygon pours and split planes (outlines as drawn)
PGND on Top Layer "Top Layer-No Net" (solid, remove dead copper, pour order 3): 985,5055 1060,4980 6070,4980 6070,2045 5865,1840 5840,1865 805,1865
GND on Top Layer "Bottom Layer-No Net" (solid, remove dead copper, pour order 6): 3930,4065 3925,4060 3925,2430 5620,2430 5630,2440 5620,2450 5620,4055
PGND on Bottom Layer "Top Layer-No Net" (solid, remove dead copper, pour order 7): 1120,5030 6070,5030 6290,4810 5710,4230 5710,1765 1175,1765 1165,1775
GND on Bottom Layer "Top Layer-No Net" (solid, remove dead copper, pour order 5): 3920,3625.99 4370,3625.99 4460,3689.17 4755,3896.24 4755,4078.75 4997.91,4078.75 5050,4042.19 5232.09,4170 5605,4170 5605,2643.27 5465,2545 5435,2566.06 3890,2566.06

## Keep-outs
Keep-Out Layer:
  lines w10: 1670,4745 1670,4665 ccw(c1700,4665) 1700,4635 5105,4635 ccw(c5105,4665) 5135,4665 5135,4755 cw(c5197.5,4752.5) 5200,4815 5310,4815 cw(c5307.5,4752.5) 5370,4750 5370,4630 5370,4570 5370,2390 5370,2165 5370,2040 cw(c5307.5,2042.5) 5305,1980 5195,1980 cw(c5197.5,2042.5) 5135,2045 5135,2130 ccw(c5105,2130) 5105,2160 1700,2160 ccw(c1700,2130) 1670,2130 1670,2040 cw(c1607.5,2042.5) 1605,1980 1495,1980 cw(c1497.5,2042.5) 1435,2045 1435,2165 1435,2185 1435,4570 1435,4630 1435,4755 cw(c1497.5,4752.5) 1500,4815 1610,4815 cw(c1607.5,4752.5) 1670,4750

## Silkscreen, mask and mechanical layers (free items; w line width, h text height)
Top Overlay:
  lines w10: 1475,5140 1475,5160 ; 1535,5130 1475,5150 ; 1535,5170 1475,5150 ; 3164.09,5150 1475,5150 ; 3725.91,5150 5415,5150 ; 5355,5130 5415,5150 ; 5355,5170 5415,5150 ; 5415,5140 5415,5160 ; 5869.01,2320.9 5889.01,2260.9 ; 5869.01,4510.9 5889.01,4570.9 ; 5879.01,2260.9 5899.01,2260.9 ; 5879.01,4570.9 5899.01,4570.9 ; 5889.01,3139.99 5889.01,2260.9 ; 5889.01,3691.82 5889.01,4570.9 ; 5909.01,2320.9 5889.01,2260.9 ; 5909.01,4510.9 5889.01,4570.9
  text "3940 (mil)" at 3174.09,5114.01 h35
  text "R+" at 3810,4265 h50
  text "R-" at 3970,4265 h50
  text "R+" at 4205,4265 h50
  text "R-" at 4360,4265 h50
  text "R+" at 4595,4265 h50
  text "R-" at 4750,4265 h50
  text "+" at 2420,4250 h80
  text "-" at 2580,4250 h80
  text "H" at 2735,4250 h80
  text "L" at 2900,4250 h80
  text "+" at 1720,4245 h80
  text "-" at 1880,4245 h80
  text "H" at 2035,4245 h80
  text "L" at 2200,4245 h80
  text "+" at 3115,4245 h80
  text "-" at 3275,4245 h80
  text "H" at 3430,4245 h80
  text "L" at 3595,4245 h80
  text "H" at 5163.13,4055.64 h80 r90
  text "A8" at 2401.84,4019.53 h45
  text "5V" at 2541.84,4019.53 h45
  text "PGND" at 2681.84,4019.53 h45
  text "C7" at 2945,4020 h45
  text "5V" at 3085,4020 h45
  text "PGND" at 3225,4020 h45
  text "A9" at 1880,4015 h45
  text "5V" at 2020,4015 h45
  text "PGND" at 2160,4015 h45
  text "-" at 1590,4000 h80
  text "C6" at 3510,4000 h45
  text "5V" at 3650,4000 h45
  text "PGND" at 3790,4000 h45
  text "L" at 5158.13,3910.64 h80 r90
  text "H" at 5158.13,3745.64 h80 r90
  text "+" at 1840,3710 h80
  text "A9" at 1875,3660 h45
  text "A8" at 2406.84,3629.53 h45
  text "5V" at 2546.84,3629.53 h45
  text "PGND" at 2686.84,3629.53 h45
  text "5V" at 2025,3625 h45
  text "PGND" at 2165,3625 h45
  text "C7" at 2950,3625 h45
  text "5V" at 3090,3625 h45
  text "PGND" at 3230,3625 h45
  text "C6" at 3520,3625 h45
  text "5V" at 3660,3625 h45
  text "PGND" at 3800,3625 h45
  text "L" at 5163.13,3590.64 h80 r90
  text "+" at 1855,3400 h80
  text "5V" at 5140,3310 h45 r90
  text "2310 (mil)" at 5925,3149.99 h35 r90
  text "3V3" at 5140,3140 h45 r90
  text "+" at 1845,3110 h80
  text "GND" at 5135,2975 h45 r90
  text "-" at 1915,2855 h80 r90
  text "TX" at 5140,2845 h45 r90
  text "RX" at 5140,2695 h45 r90
  text "+" at 1740,2670 h80
  text "+" at 1915,2535 h80
  text "+" at 2230,2525 h80
  text "+" at 1535,2510 h80
  text "PGND" at 2750,2460 h45
  text "B7" at 2955,2460 h45
  text "B6" at 3095,2460 h45
  text "5V" at 3255,2460 h45
  text "PGND" at 3445,2460 h45
  text "A1" at 3650,2460 h45
  text "A0" at 3790,2460 h45
  text "5V" at 3950,2460 h45
  text "PGND" at 4140,2455 h45
  text "A7" at 4345,2455 h45
  text "A6" at 4485,2455 h45
  text "5V" at 4645,2455 h45
  text "+" at 2540,2445 h80
  text "-" at 1550,2290 h80
Bottom Overlay:
  text "5V" at 2115,3805 h45
  text "PGND" at 2320,3805 h45
  text "5V" at 2636.84,3804.53 h45
  text "PGND" at 2841.84,3804.53 h45
  text "A9" at 1965,3800 h45
  text "A8" at 2486.84,3799.53 h45
  text "5V" at 3180,3800 h45
  text "PGND" at 3385,3800 h45
  text "C6" at 3525,3800 h45
  text "5V" at 3750,3800 h45
  text "PGND" at 3955,3800 h45
  text "C7" at 3030,3795 h45
  text "L" at 2980,3125 h1500
Top Solder:
  lines w100: 1500,3460 1507.91,3452.09 1620,3452.09 ; 1520,3150 1525,3145 1620,3145 ; 1520,3770 1530.83,3759.17 1620,3759.17 ; 1620,3298.54 1758.54,3298.54 1760,3300 ; 1620,3605.63 1750.63,3605.63 1755,3610 ; 1620,3912.72 1622.28,3915 1755,3915 1770,3900 1770,2865 ; 1620.37,2715 1620.37,2714.63 ; 1620.37,2865 1770,2865 ; 1730,2220 1705,2245 1675,2275 1675,2660 1620.37,2714.63 ; 1740,2225 2555,2225 2570,2240 2570,2335 2570,2245 2560,2235 ; 1802.28,2335 1802.28,2387.28 1865,2450 2360,2450 2410,2400 ; 1950,2225 1955.83,2230.83 1955.83,2335 ; 2109.37,2335 2110,2335.63 2110,2525 2065,2570 1770,2865 ; 2262.91,2335 2262.91,2242.09 2275,2230 ; 2400,2420 2416.46,2403.54 2416.46,2335 ; 3120,4560 3145,4535 3145,4430 ; 3155,4555 3150,4560 1835,4560 1745,4470 1745,4420 1500,4175 1500,2775 1520,2755 1560.37,2714.63 1620.37,2714.63
Bottom Solder:
  lines w100: 1500,3155 1510,3145 1620,3145 ; 1510,3460 1517.91,3452.09 1620,3452.09 ; 1520,3765 1525.83,3759.17 1620,3759.17 ; 1620,3298.54 1746.46,3298.54 1750,3295 ; 1620,3605.63 1749.37,3605.63 1750,3605 ; 1620,3912.72 1622.28,3915 ; 1620.37,2715 1620.37,2714.63 ; 1620.37,2865 1770,2865 ; 1715,2225 2555,2225 2575,2245 ; 1715,2235 1675,2275 1675,2660 1620.37,2714.63 ; 1802.28,2335 1802.28,2387.28 1865,2450 2360,2450 2410,2400 2416.46,2393.54 2416.46,2335 ; 1908.54,4430 1908.54,4201.26 ; 1940,2235 1955.83,2250.83 1955.83,2335 ; 2109.37,2335 2109.37,2524.37 2109.37,2525.63 2085,2550 1770,2865 ; 2262.91,2335 2262.91,2232.09 2265,2230 ; 2445,4560 2450,4555 2450,4430 ; 2555,2235 2570,2250 2570,2335 ; 2603.54,4430 2603.54,4221.46 2605,4220 ; 3145,4430 3145,4550 3135,4560 1835,4560 1755,4480 1755,4430 1500,4175 1500,2775 1560.37,2714.63 1620.37,2714.63 ; 3298.54,4430 3305,4423.54 3305,4220 3286.26,4201.26 1908.54,4201.26 ; 1622.28,3915 1908.54,4201.26 ; 1622.28,3915 1750,3915 1770,3895 1770,2865

## Text inside footprints (layer, text, board x,y; h text height)
core: Top Overlay "STM32F103" at 4280,3285 h60; Top Overlay "P1" at 4890,2710 h60 r90; Top Overlay "3V3" at 5050,2720 h60 r90
Ring: Top Overlay "+" at 5225,2105 h100 r90
step_down1: Top Overlay "Step_UP_DOWN" at 2565,2975 h35
U6: Bottom Overlay "LM1117" at 4545.87,2827.13 h35